# EAGLE board sgd710_pic32_sch (EAGLE 8.7.1)
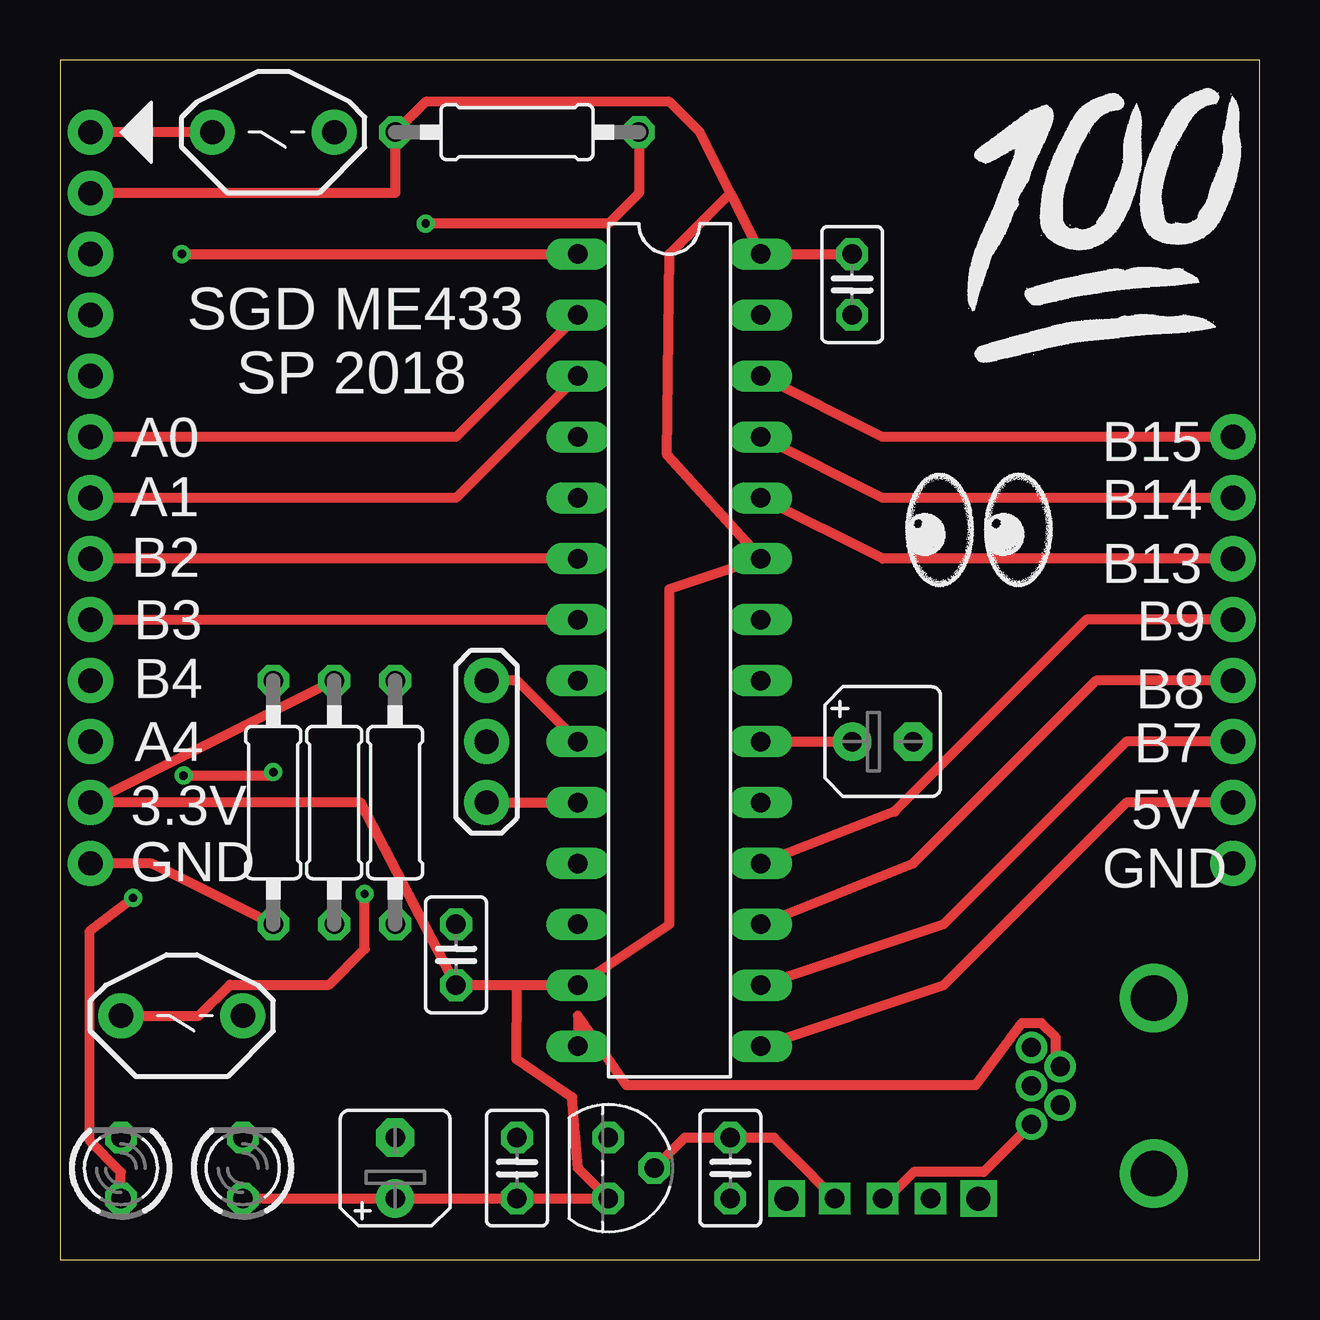
[diagram p0: board, top side]
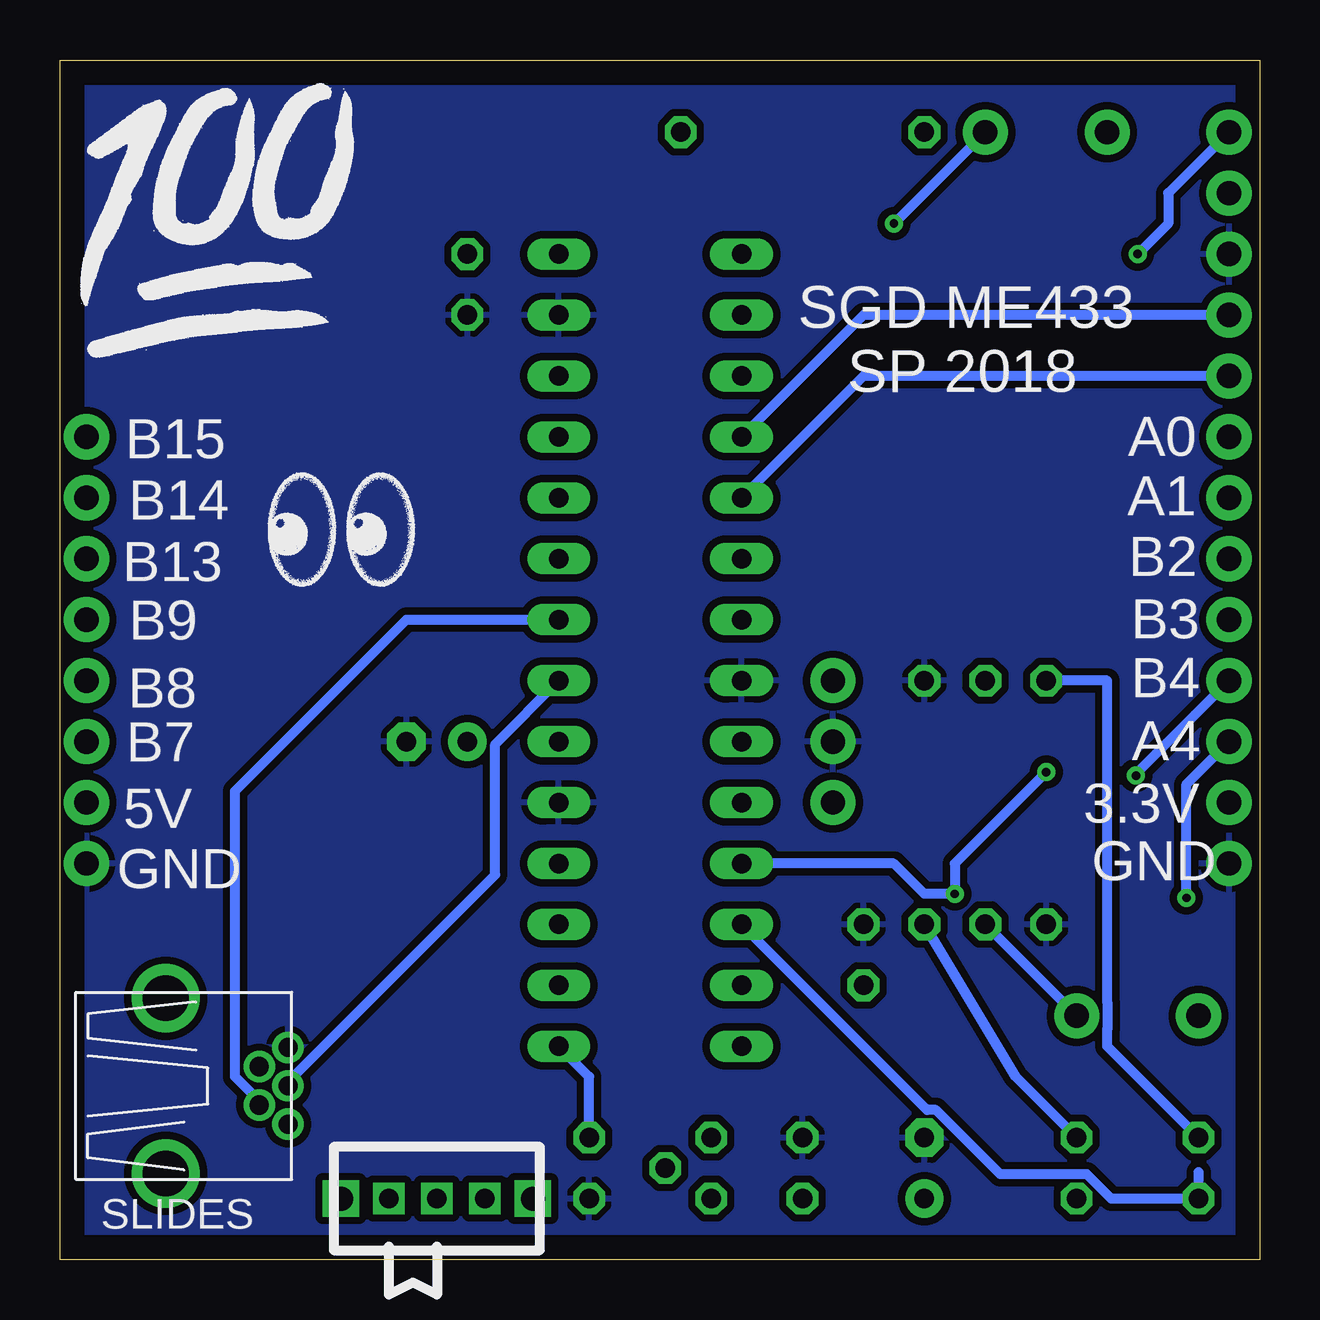
[diagram p1: board, bottom side, seen from below]

Size 50 x 50 mm. Coordinates in mm from the lower left corner, seen from the top.
Outline: 0,0 50,0 50,50 0,50 0,0
Copper layers (1*16): Top 0.035mm / dielectric 1.5mm / Bottom 0.035mm
Design rules "default": minimum track width 6mil, minimum drill 0.35mm, track to track 6mil, track to pad 6mil, pad to pad 6mil, via to via 6mil, smd to smd 6mil, copper to edge 40mil, drill to drill 6mil, minimum pad ring 10mil, minimum via ring 8mil, stop-mask expansion 4mil, vias tented up to drill 0mil, thermal gap 10mil

## Footprints (pad centres in the part's own frame; a part is rotated, then mirrored left to right if it is on the bottom)
C025-025X050 = drill 0.813 octagon: 1 -1.27,0; 2 1.27,0
B45181A = drill 0.813 pad 1.6: + -1.27,0 | drill 0.813 pad 1.6 octagon: - 1.27,0
USB-MB-H = drill 0.8: D+ 5.1,0; D- 3.9,0.8; GND 5.1,-1.6; ID 3.9,-0.8; VBUS 5.1,1.6 | drill 1.9: P$6 0,-3.65; P$7 0,3.65
LED3MM = drill 0.813 octagon: A -1.27,0; K 1.27,0
0207/10 = drill 0.813 octagon: 1 -5.08,0; 2 5.08,0
DIL28-3 = drill 0.813 long: 1 -16.51,-3.81; 2 -13.97,-3.81; 3 -11.43,-3.81; 4 -8.89,-3.81; 5 -6.35,-3.81; 6 -3.81,-3.81; 7 -1.27,-3.81; 8 1.27,-3.81; 9 3.81,-3.81; 10 6.35,-3.81; 11 8.89,-3.81; 12 11.43,-3.81; 13 13.97,-3.81; 14 16.51,-3.81; 15 16.51,3.81; 16 13.97,3.81; 17 11.43,3.81; 18 8.89,3.81; 19 6.35,3.81; 20 3.81,3.81; 21 1.27,3.81; 22 -1.27,3.81; 23 -3.81,3.81; 24 -6.35,3.81; 25 -8.89,3.81; 26 -11.43,3.81; 27 -13.97,3.81; 28 -16.51,3.81
SLIDE = drill 0.8 square: 1 -2,0; 2 0,0; 3 2,0 | drill 1 square: P$1 -4,0; P$2 4,0
TO92 = drill 0.813 octagon: 1 -1.27,0; 2 0,1.905; 3 1.27,0
PB = drill 1.016 pad 1.88: 1 -2.54,0; 2 2.54,0
1X08 = drill 1.016 pad 1.88: 1 0,0; 2 2.54,0; 3 5.08,0; 4 7.62,0; 5 10.16,0; 6 12.7,0; 7 15.24,0; 8 17.78,0
1X05 = drill 1.016 pad 1.88: 1 0,0; 2 2.54,0; 3 5.08,0; 4 7.62,0; 5 10.16,0
OSC = drill 1.016 pad 1.88: 1 -2.54,0; 2 0,0; 3 2.54,0

## Placement (x,y rotation side)
C1  0.1uF  [C025-025X050]  33.02,40.64 270 top
C2  0.1uF  [C025-025X050]  16.51,12.7 90 top
C3  0.1uF  [C025-025X050]  27.94,3.81 270 top
C4  0.1uF  [C025-025X050]  19.05,3.81 90 top
C5  10uF  [B45181A]  34.29,21.59 0 top
C6  10uF  [B45181A]  13.97,3.81 90 top
J1  USB-MB-H  [USB-MB-H]  45.59,7.24 180 top
LED1  GREEN  [LED3MM]  2.54,3.81 90 top
LED2  RED  [LED3MM]  7.62,3.81 90 top
R1  330  [0207/10]  13.97,19.05 270 top
R2  330  [0207/10]  8.89,19.05 90 top
R3  10k  [0207/10]  19.05,46.99 0 top
R4  10k  [0207/10]  11.43,19.05 270 top
U$1  PIC23MX250F128B  [DIL28-3]  25.4,25.4 270 top
U$2  SLIDES  [SLIDE]  34.29,2.54 180 bottom
U$3  MCP1702  [TO92]  22.86,3.81 270 top
U$4  RESET  [PB]  8.89,46.99 180 top
U$5  USER  [PB]  5.08,10.16 180 top
U$6  CONN_8  [1X08]  48.9,16.51 90 top
U$7  CONN_8  [1X08]  1.27,16.51 90 top
U$8  PICKIT  [1X05]  1.27,46.99 270 top
U$9  8MHz  [OSC]  17.78,21.59 90 top

## Library data of the parts
C1-C6 J1 R1-R4 U$1-U$9 = sgd710_pic32_lib
LED1 LED2 = led

## Nets
+3V3: C1.1 C2.1 C4.1 C6.+ LED2.A R3.1 R4.1 U$1.13 U$1.23 U$1.28 U$3.3 U$7.2 U$8.2
+5V: C3.1 U$1.15 U$2.1 U$3.2 U$6.2
A0: U$1.2 U$7.8
A1: U$1.3 U$7.7
A4/LED: LED1.A U$1.12 U$7.3
B2: U$1.6 U$7.6
B3: U$1.7 U$7.5
B4/USER: U$1.11 U$5.2 U$7.4
B7: U$1.16 U$6.3
B8: U$1.17 U$6.4
B9: U$1.18 U$6.5
B13: U$1.24 U$6.6
B14: U$1.25 U$6.7
B15: U$1.26 U$6.8
D+: J1.D+ U$1.21
D-: J1.D- U$1.22
GND: C1.2 C2.2 C3.2 C4.2 C5.- C6.- J1.GND R1.1 R2.1 U$1.8 U$1.19 U$1.27 U$6.1 U$7.1 U$8.3 U$9.2
MCLR: U$1.1 U$4.2 U$8.1
N$1: J1.VBUS U$2.2
N$2: LED2.K R1.2
N$3: U$1.9 U$9.3
N$4: U$1.10 U$9.1
N$5: LED1.K R2.2
N$6: C5.+ U$1.20
N$7: R3.2 U$4.1
N$8: R4.2 U$5.1
PGC: U$1.5 U$8.5
PGD: U$1.4 U$8.4
USBID: J1.ID U$1.14

## Tracks (layer width: path | path; a pad name or v marks a point on that pad's centre or on a via)
+3V3
  Top 0.406: LED2.A C6.+ C4.1 U$3.3 21.59,3.81 21.35,6.77 19.02,8.34 19.05,11.43 | 19.05,11.43 U$1.13 25.4,13.97 25.4,27.94 U$1.23 25.31,33.53 25.4,41.91 27.94,44.45 U$1.28 | 19.05,11.43 C2.1 12.53,19.05 U$7.2 R4.1 | U$1.28 C1.1 | U$1.28 26.67,46.99 25.4,48.26 15.24,48.26 R3.1 13.97,44.45 U$8.2
+5V
  Top 0.406: U$2.1 31.4,3.43 31.4,3.44 29.76,5.08 C3.1 26.04,5.08 U$3.2 | U$1.15 36.83,11.43 44.45,19.05 U$6.2
  Bottom 0.406: C3.1 27.94,7.62 U$1.15
A0
  Top 0.406: U$1.2 16.51,34.29 U$7.8
A1
  Top 0.406: U$1.3 16.51,31.75 U$7.7
A4/LED  (via drill 0.35)
  Top 0.406: LED1.A 2.54,3.64 1.25,4.94 1.25,13.69 v3.05,15.07
  Bottom 0.406: 2.54,3.64 LED1.A 6.18,2.54 7.2,3.56 10.81,3.56 13.49,6.24 13.86,6.24 U$1.12 | v3.05,15.07 3.05,19.81 U$7.3
B2
  Top 0.406: U$1.6 U$7.6
B3
  Top 0.406: U$7.5 U$1.7
B4/USER  (via drill 0.35)
  Top 0.406: U$5.2 5.79,10.16 7.08,11.46 11.21,11.46 12.7,12.94 v12.7,15.24 | v5.15,20.17 8.74,20.17 v8.89,20.32
  Bottom 0.406: U$1.11 15.24,16.51 13.97,15.24 v12.7,15.24 12.7,16.51 v8.89,20.32 | v5.15,20.17 5.15,20.25 U$7.4
B7
  Top 0.406: U$1.16 36.83,13.97 44.45,21.59 U$6.3
B8
  Top 0.406: U$1.17 35.56,16.51 43.18,24.13 U$6.4
B9
  Top 0.406: U$1.18 34.78,18.67 42.79,26.67 U$6.5
B13
  Top 0.406: U$6.6 34.29,29.21 U$1.24
B14
  Top 0.406: U$6.7 34.29,31.75 U$1.25
B15
  Top 0.406: U$6.8 34.29,34.29 U$1.26
D+
  Bottom 0.406: U$1.21 31.86,21.48 31.86,16.04 40.49,7.41 J1.D+
D-
  Bottom 0.406: J1.D- 41.69,6.61 42.7,7.62 42.7,19.53 35.56,26.67 U$1.22
GND
  Top 0.406: R2.1 3.81,16.51 U$7.1
  pour Bottom (isolate 0.305): 0,49.53 49.53,49.53 49.53,0 0,0
MCLR  (via drill 0.35)
  Top 0.406: v5.08,41.91 U$1.1 | U$4.2 U$8.1
  Bottom 0.406: U$8.1 3.81,44.45 3.81,43.18 v5.08,41.91
N$1
  Top 0.406: J1.VBUS 38.5,3.65 35.59,3.65 34.48,2.54 U$2.2
N$2
  Bottom 0.406: LED2.K 10.16,7.62 R1.2
N$3
  Top 0.406: U$1.9 19.05,24.13 U$9.3
N$4
  Top 0.406: U$9.1 U$1.10
N$5
  Bottom 0.406: LED1.K 6.35,8.89 6.35,9.6 6.33,9.62 6.33,10.7 6.35,10.72 6.35,24.13 R2.2
N$6
  Top 0.406: U$1.20 C5.+
N$7  (via drill 0.35)
  Top 0.406: R3.2 24.13,44.45 22.86,43.18 v15.24,43.18
  Bottom 0.406: U$4.1 v15.24,43.18
N$8
  Bottom 0.406: U$5.1 R4.2
PGC
  Bottom 0.406: U$8.5 16.51,36.83 U$1.5
PGD
  Bottom 0.406: U$8.4 16.51,39.37 U$1.4
USBID
  Top 0.406: J1.ID 41.5,8.23 41.5,9.26 40.91,9.85 40.08,9.85 38.16,7.26 23.61,7.26 21.59,10.16 U$1.14

## Text on the board
tPlace: SGD ME433 / SP 2018 | A0 | B15 | A1 | B14 | B2 | B13 | B3 | B9 | B4 | B8 | A4 | B7 | 3.3V | 5V | GND | GND
bPlace: SGD ME433 / SP 2018 | A0 | B15 | A1 | B14 | B2 | B13 | B3 | B9 | B4 | B8 | A4 | B7 | 3.3V | 5V | GND | GND